# Altium PCB PCB1.PcbDoc
Units mm, origin at the board's own origin, x right, y up, seen from the top; angles counter-clockwise.
Board outline 97.03 x 86.61 mm, 2 copper layers (Top Layer, Bottom Layer); 77 components, 63 nets, 297 pads, 22 vias.
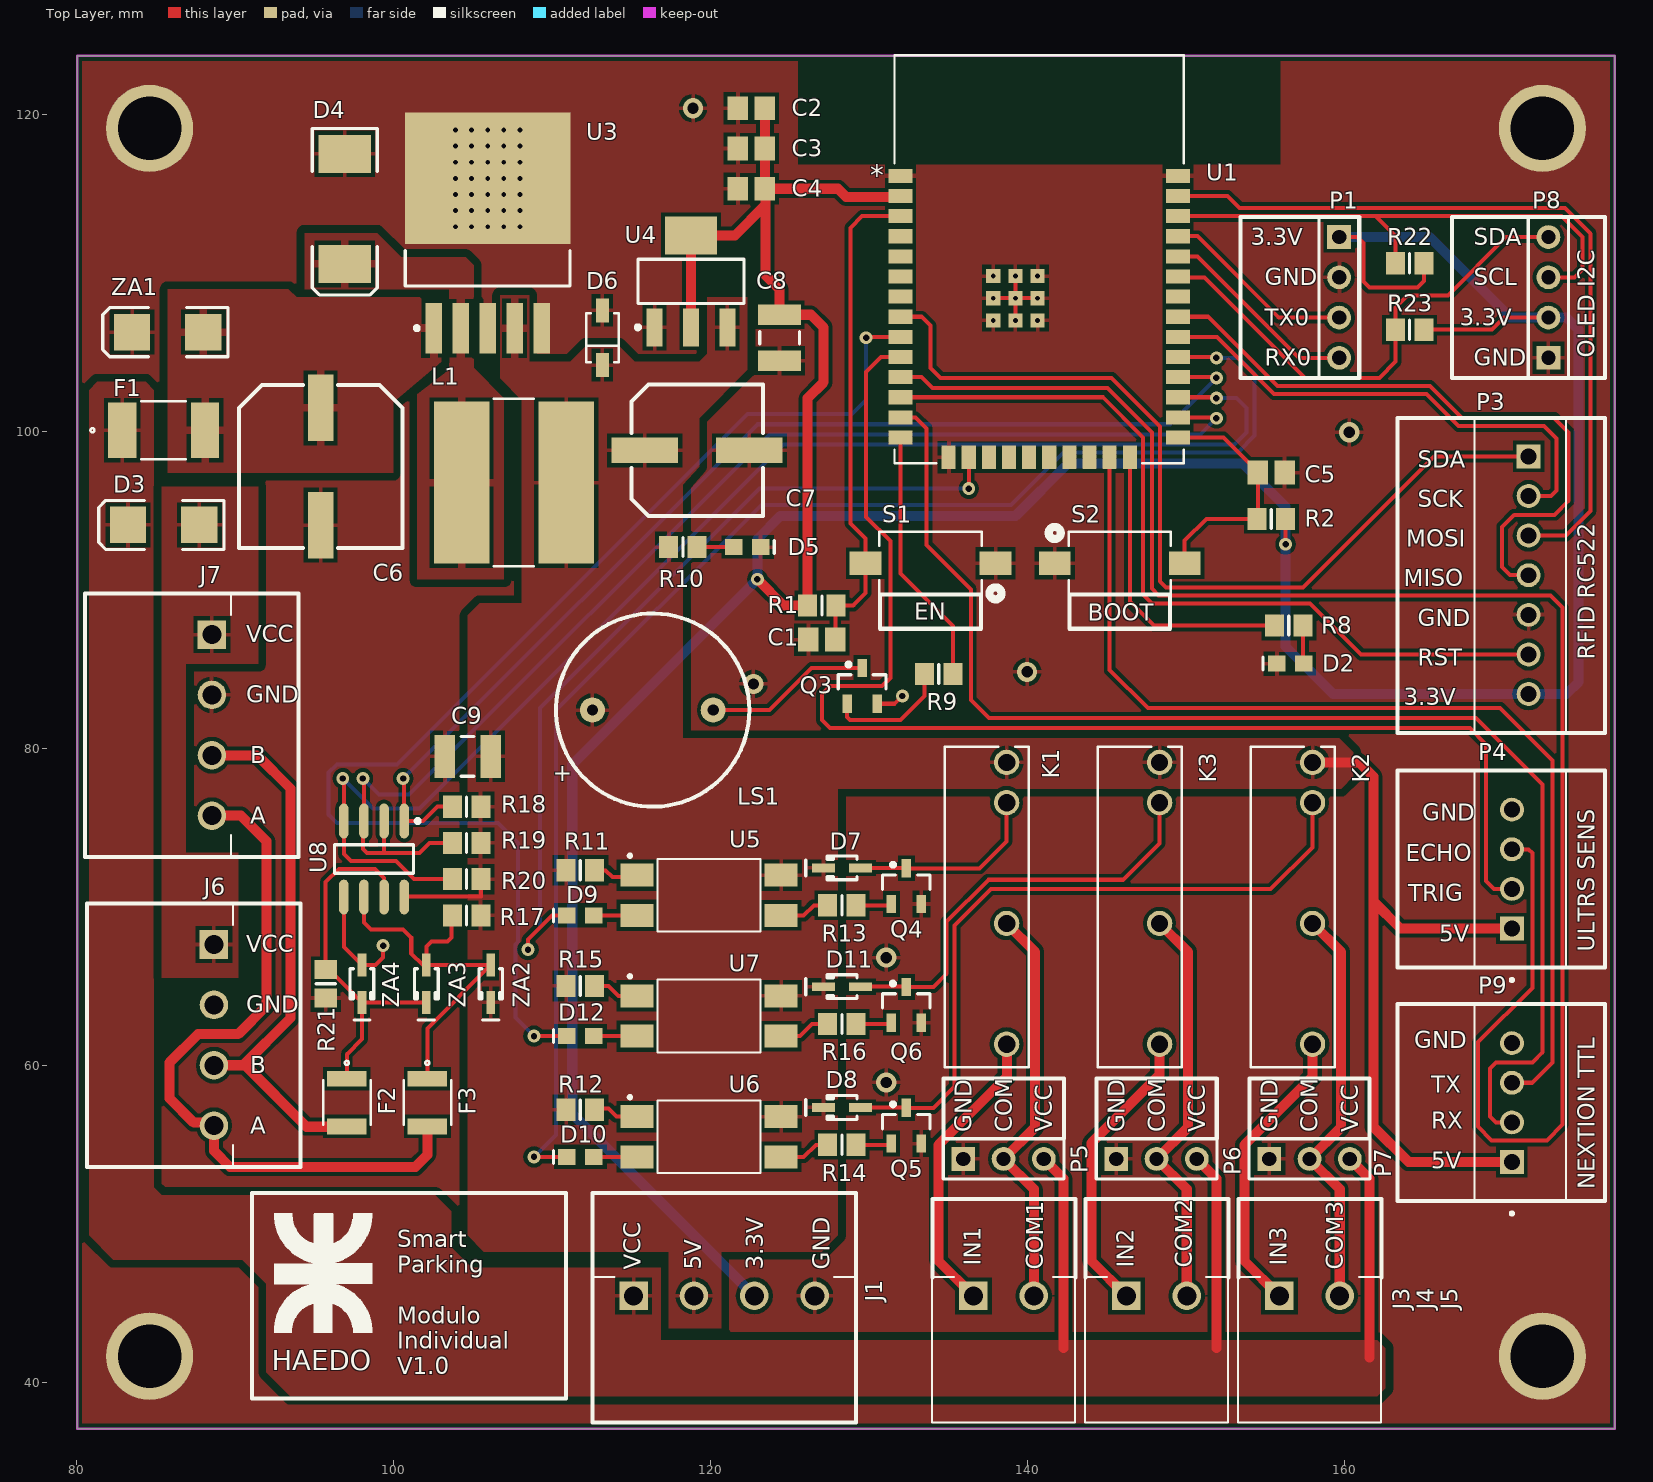
[diagram p0: Top Layer view]
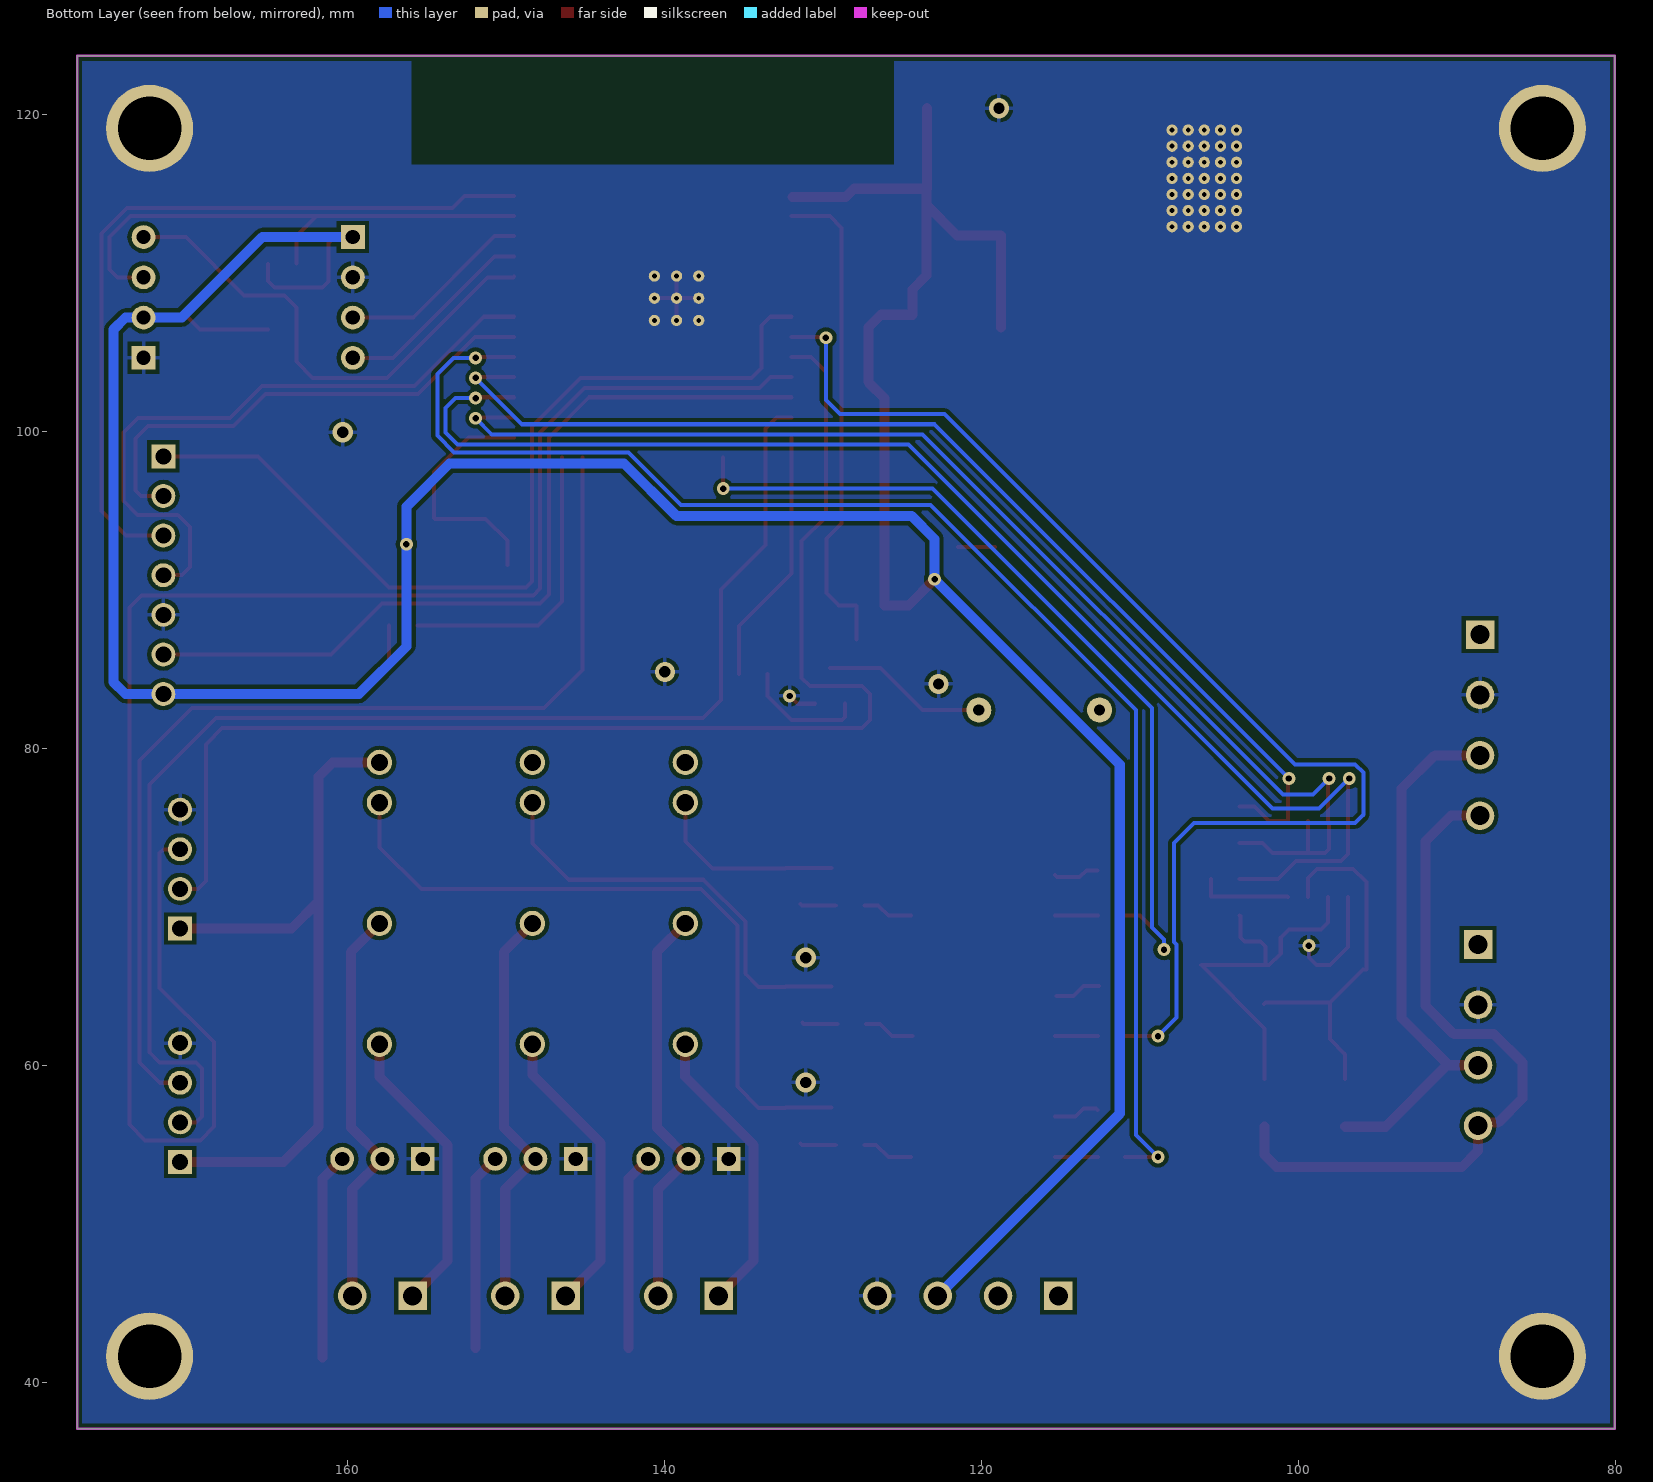
[diagram p1: Bottom Layer view, seen from below]
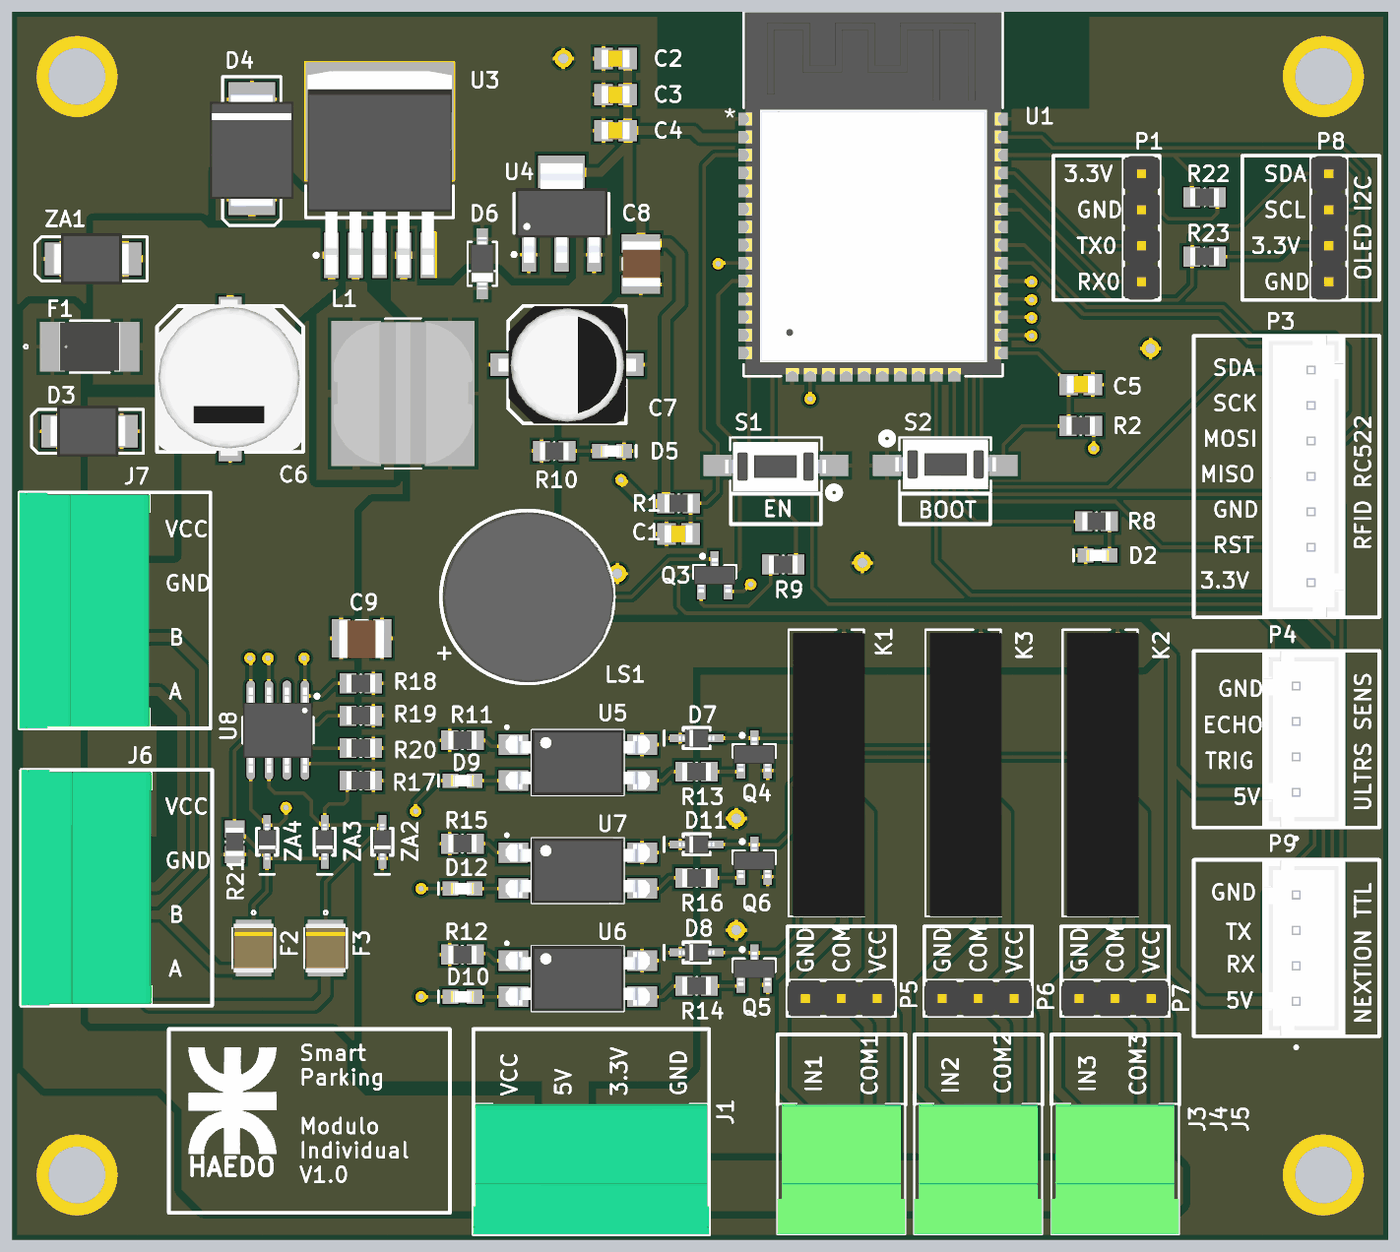
[diagram p2: 3D render of the assembled board from above, using the file's embedded part models]

## Layer stack, top to bottom
Top Solder: solder mask 0.0102, Solder Resist, Dk 3.5
Top Layer: signal copper 0.0356
Dielectric 1: dielectric 0.32, FR-4, Dk 4.8
Bottom Layer: signal copper 0.0356
Bottom Solder: solder mask 0.0102, Solder Resist, Dk 3.5

## Board outline
80.01,37.084 80.01,123.698 177.038,123.698 177.038,37.084

## Design rules (kind name [scope] priority, off if disabled: settings)
Clearance Clearance_6mil [InComponent('U2') OR InComponent('P2')] p1: gap=0.152
Clearance [All] p2: gap=0.254 except(0.508: Poly-Poly)
HoleSize [All] p1: absolutevalues=TRUE maxlimit=5 minlimit=0.025 maxpercent=80.000 minpercent=20.000
MinimumSolderMaskSliver [All] p1: minsoldermaskwidth=0.051
PolygonConnect DirectConnect [(ObjectKind = 'Pad') and (Name Like 'Free-DirectFree') or (Name Like 'U3-6') or (Name Like 'U3-5')] p1: connectstyle=Direct reliefconductorwidth=0.254 reliefentries=4 polygonreliefangle="90 Angle" airgapwidth=0.254
PolygonConnect LM2596 [InNet('NetD4_2') OR InNet('NetC6_1') OR (Name Like 'U3-4') OR (Name Like 'U3-2') or (Name Like 'U3-3')] p2: connectstyle=Relief reliefconductorwidth=0.508 reliefentries=4 polygonreliefangle="90 Angle" airgapwidth=0.254
PolygonConnect [All] p3: connectstyle=Relief reliefconductorwidth=0.254 reliefentries=4 polygonreliefangle="90 Angle" airgapwidth=0.254
RoutingVias [All] p1: holewidth=0.406 width=0.813 viastyle="Through Hole" minholewidth=0.406 minwidth=0.813 maxholewidth=0.406 maxwidth=0.813 viatemplateguid#1={E6CBA73B-ED68-4CBC-8B1B-74DA3DA10CD0} viatemplatename#1=v81h41
SilkToSilkClearance [All] p1: silktosilkclearance=0.051
SilkToSolderMaskClearance [IsPad] p1: minsilkscreentomaskgap=0.025 clearancetoexposedcopper=TRUE
SolderMaskExpansion [All] p1: expansion=0.102
Width [All] p1: maxlimit=0.635 minlimit=0.254 preferedwidth=0.254
26 further rules are at their usual default settings.

## Classes and differential pairs
component class Comunicaciones: C9 F2 F3 J6 J7 P8 P9 R17 R18 R19 R20 R21 R22 R23 U8 ZA2 ZA3 ZA4
component class ESP32-WROOM-32E: C1 C2 C3 C4 C5 P1 R1 R2 S1 S2 U1
component class Fuentes: C6 C7 C8 D3 D4 D5 D6 F1 L1 R10 U3 U4 ZA1
component class MainBoard: D2 J1 LS1 P3 P4 Q3 R8 R9
component class "Salidas con relé": D7 D8 D9 D10 D11 D12 J3 J4 J5 K1 K2 K3 P5 P6 P7 Q4 Q5 Q6 R11 R12 R13 R14 R15 R16 U6 U7

## Components (designator, comment, footprint, x,y, rotation, side; value= is the part's Value field where it differs from the comment)
C1 "100nF" CAPC2012N 127,86.868 r180 top
C2 "0.1uF" CAPC2012N 122.555,120.396 r180 top
C3 "0.1uF" CAPC2012N 122.555,117.856 r180 top
C4 "22uF" CAPC2012N 122.555,115.316 r180 top
C5 "100nF" CAPC2012N 155.36,97.409 r0 top
C6 "470uF" CapElecSMD_10mm 95.376,97.79 r90 top
C7 "330uF" CapElecSMD_8mm 119.126,98.806 r180 top
C8 "10uF" CAPC3225N 124.332,105.918 r270 top
C9 "1uF" CAPC3225N 104.648,79.502 r180 top
D2 "APT1608CGCK" ChipDiode1608 156.545,85.352 r180 top
D3 "RS3JB-13-F" SMB 85.471,94.107 r180 top
D4 "B540C-13-F" SMC 96.9,114.046 r270 top
D5 "APT1608CGCK" ChipDiode1608 122.3,92.71 r0 top
D6 "MMSZ5V6T1G" SOD-123_ONS-M 113.156,105.918 r90 top
D7 "1N4448WS" SOD-323 128.27,72.462 r180 top
D8 "1N4448WS" SOD-323 128.27,57.349 r180 top
D9 "APT1608CGCK" ChipDiode1608 111.76,69.469 r180 top
D10 "APT1608CGCK" ChipDiode1608 111.76,54.229 r180 top
D11 "1N4448WS" SOD-323 128.27,64.969 r180 top
D12 "APT1608CGCK" ChipDiode1608 111.76,61.849 r180 top
F1 "PTS18126V300" FUSE_PTS18126_COB 85.471,100.076 r0 top
F2 "MF-USMF050-2" MF-USMF050-2 97.028,57.658 r270 top
F3 "MF-USMF050-2" MF-USMF050-2 102.108,57.658 r270 top
J1 "TERMBLOCK_3.81MM" TERMBLOCK_3.81MM_90DEG_4POS 120.904,42.545 r0 top
J3 "TERMBLOCK_3.81MM" TERMBLOCK_3.81MM_90DEG_2POS 138.408,41.656 r0 top
J4 "TERMBLOCK_3.81MM" TERMBLOCK_3.81MM_90DEG_2POS 148.06,41.656 r0 top
J5 "TERMBLOCK_3.81MM" TERMBLOCK_3.81MM_90DEG_2POS 157.712,41.656 r0 top
J6 "TERMBLOCK_3.81MM" TERMBLOCK_3.81MM_90DEG_4POS 85.725,61.849 r270 top
J7 "TERMBLOCK_3.81MM" TERMBLOCK_3.81MM_90DEG_4POS 85.598,81.407 r270 top
K1 "G6DN-1A DC5" RELAY_G6DN-1A_OMR 138.658,79.121 r0 top
K2 "G6DN-1A DC5" RELAY_G6DN-1A_OMR 157.962,79.121 r0 top
K3 "G6DN-1A DC5" RELAY_G6DN-1A_OMR 148.31,79.121 r0 top
L1 "47uH" INDUCTOR_47UH_3A 107.568,96.774 r0 top
LS1 "Buzzer" BUZZER 112.522,82.423 r180 top
P1 "USB-TTL" CONNHDR_1X4_2.54MM 159.512,108.458 r270 top
P3 "RFID RC522" MOD_RFID_RC522 171.069,90.932 r0 top
P4 "ULTRS SENS" CONN-B4B-XH-A 171.069,72.39 r270 top
P5 "Header 3" CONNHDR_1X3_2.54MM 138.468,54.102 r0 top
P6 "Header 3" CONNHDR_1X3_2.54MM 148.12,54.102 r0 top
P7 "Header 3" CONNHDR_1X3_2.54MM 157.772,54.102 r0 top
P8 "OLED I2C" CONNHDR_1X4_2.54MM 172.974,108.458 r90 top
P9 "NEXTION TTL" CONN-B4B-XH-A 171.069,57.658 r270 top
Q3 "MMBT3904" MMBT3904 129.54,83.947 r90 top
Q4 "MMBT3904" MMBT3904 132.334,71.312 r90 top
Q5 "MMBT3904" MMBT3904 132.334,56.199 r90 top
Q6 "MMBT3904" MMBT3904 132.334,63.819 r90 top
R1 "10MΩ" RESC2012N 127,89.027 r180 top
R2 "10MΩ" RESC2012N 155.36,94.488 r0 top
R8 "1k" RESC2012N 156.464,87.757 r180 top
R9 "1k" RESC2012N 134.377,84.709 r180 top
R10 "1k" RESC2012N 118.236,92.71 r180 top
R11 "1k" RESC2012N 111.76,72.312 r180 top
R12 "1k" RESC2012N 111.76,57.199 r180 top
R13 "470" RESC2012N 128.27,70.104 r0 top
R14 "470" RESC2012N 128.27,54.991 r0 top
R15 "1k" RESC2012N 111.76,65.017 r180 top
R16 "470" RESC2012N 128.27,62.611 r0 top
R17 "100K" RESC2012N 104.584,69.469 r0 top
R18 "10K" RESC2012N 104.584,76.327 r0 top
R19 "10K" RESC2012N 104.584,74.041 r0 top
R20 "10K" RESC2012N 104.584,71.755 r0 top
R21 "100K" RESC2012N 95.694,65.151 r90 top
R22 "4.7k" RESC2012N 164.084,110.617 r0 top
R23 "4.7k" RESC2012N 164.084,106.426 r0 top
S1 "RESET" "SWITCH TACTILE SPST-NO 0.05A 12V" 133.858,91.694 r180 top
S2 "BOOT" "SWITCH TACTILE SPST-NO 0.05A 12V" 145.796,91.694 r0 top
U1 "ESP32-WROOM-32E" ESP32-WROOM-32E 140.716,110.871 r0 top
U3 "LM2596S-5.0" LM2596S-5.0 106.044,112.522 r90 top
U4 "TLV1117LV33" SOT223 118.744,109.474 r90 top
U5 "FOD817CSD" "OPTOISOLATOR 5KV TRANSISTOR 4SMD" 119.888,70.739 r0 top
U6 "FOD817CSD" "OPTOISOLATOR 5KV TRANSISTOR 4SMD" 119.888,55.499 r0 top
U7 "FOD817CSD" "OPTOISOLATOR 5KV TRANSISTOR 4SMD" 119.888,63.119 r0 top
U8 "MAX485" MAX485 98.742,73.025 r270 top
ZA1 "P6SMB33CA" SMB 85.724,106.268 r180 top
ZA2 "SD12C-7" SOD-323 106.108,65.151 r270 top
ZA3 "SD12C-7" SOD-323 102.044,65.151 r270 top
ZA4 "SD12C-7" SOD-323 97.98,65.151 r270 top

## Footprints (in the part's own frame and the unit in brackets; to place one, negate y for a bottom-side part, rotate by r counter-clockwise, add the part's x,y. Pads: shape width x height; smd on the part's side, far side on the other; paste and mask are expansions set on the pad)
BUZZER [mil]
  round 62 hole 28: 1(0,0) 2(-300,0)
  silkscreen extent -390,-240 90,240, body extent -390,-235 83,237, height 354
CAPC2012N [mm] "Chip Capacitor (Imperial: 0805, Metric: 2012)"
  rect 1.3x1.5 smd: 1(-0.85,0) 2(0.85,0)
  body extent -1,-0.62 1,0.63, height 0.88
CAPC3225N [mm] "Chip Capacitor, Body 3.2x2.5mm, IPC Medium Density"
  rect 1.3x2.7 smd: 1(-1.45,0) 2(1.45,0)
  silkscreen extent -0.4,-1.25 0.4,1.25, body extent -1.6,-1.3 1.6,1.4, height 2.44
CapElecSMD_8mm [mm]
  rect 4.2x1.6 smd: 1(3.3,0) 2(-3.3,0)
  silkscreen extent -4.15,-4.15 4.15,4.15, body extent -4.88,-4.12 4.82,4.17, height 10.2
CapElecSMD_10mm [mm]
  rect 4.2x1.6 smd: 1(3.7,0) 2(-3.7,0)
  silkscreen extent -5.15,-5.15 5.15,5.15, body extent -5.4,-5.07 5.6,5.23, height 12.52
ChipDiode1608 [mm] "Chip Diode; 0603 (1608 Metric)"
  rect 1.1x1 smd: 1(-0.85,0) 2(0.85,0)
  silkscreen extent 1.7,-0.4 1.7,0.4, body extent -0.8,-0.4 0.8,0.4, height 0.75
CONN-B4B-XH-A [mm] "CONN HEADER VERT 4POS 2.5MM"
  rect 1.508x1.508 / inner round 1.508 / far side rect 1.508x1.508 hole 1: 1(3.75,-0.525)
  round 1.508 hole 1: 2(1.25,-0.525) 3(-1.25,-0.525) 4(-3.75,-0.525)
  silkscreen extent -6.2,-2.88 7.1,2.88, body extent -6.2,-2.88 6.2,2.88, height 7
CONNHDR_1X3_2.54MM [mm] "CONN HEADER VERT 3POS 2.54MM"
  rect 1.5x1.5 hole 0.9: 1(-2.54,0)
  round 1.5 hole 0.9: 2(0,0) 3(2.54,0)
  silkscreen extent -3.81,-1.27 3.81,1.27, body extent -3.81,-1.27 3.81,1.27, height 8.54
CONNHDR_1X4_2.54MM [mm] "CONN HEADER VERT 4POS 2.54MM"
  rect 1.5x1.5 hole 0.9: 1(-3.81,0.127)
  round 1.5 hole 0.9: 2(-1.27,0.127) 3(1.27,0.127) 4(3.81,0.127)
  silkscreen extent -5.08,-1.14 5.08,1.4, body extent -5.08,-1.14 5.08,1.4, height 8.54
ESP32-WROOM-32E [mil] "ESP32-WROOM-32E con antena integrada."
  rect 59x35 smd paste+0 mask+0: 1(-344.5,207.1) 2(-344.5,157.1) 3(-344.5,107.1) 4(-344.5,57.1) 5(-344.5,7.1) 6(-344.5,-42.9) 7(-344.5,-92.9) 8(-344.5,-142.9) 9(-344.5,-192.9) 10(-344.5,-242.9) 11(-344.5,-292.9) 12(-344.5,-342.9) 13(-344.5,-392.9) 14(-344.5,-442.9) 25(344.5,-442.9) 26(344.5,-392.9) 27(344.5,-342.9) 28(344.5,-292.9) 29(344.5,-242.9) 30(344.5,-192.9) 31(344.5,-142.9) 32(344.5,-92.9) 33(344.5,-42.9) 34(344.5,7.1) 35(344.5,57.1) 36(344.5,107.1) 37(344.5,157.1) 38(344.5,207.1)
  rect 35x59 smd paste+0 mask+0: 15(-225,-492.15) 16(-175,-492.15) 17(-125,-492.15) 18(-75,-492.15) 19(-25,-492.15) 20(25,-492.15) 21(75,-492.15) 22(125,-492.15) 23(175,-492.15) 24(225,-492.15)
  rect 35x35 smd paste+0 mask+0: 39(-59.1,-96.9) 40(-114.2,-41.8) 41(-114.2,-96.9) 42(-114.2,-152) 43(-59.1,-152) 44(-4,-152) 45(-4,-96.9) 46(-4,-41.8) 47(-59.1,-41.8)
  silkscreen extent -360,-507 360,507, body extent -354,-502 355,502, height 128
FUSE_PTS18126_COB [mil]
  rect 70x138 smd paste+0 mask+0: 1(-102.95,0) 2(102.95,0)
  silkscreen extent -182,-72 55,72, body extent -84,-69 84,69, height 47
INDUCTOR_47UH_3A [mil] "CIAA_NXP"
  rect 138x402 smd paste+0 mask+0: 1(-130,0) 2(130,0)
  silkscreen extent -50,-208 50,208, body extent -193,-196 193,198, height 236
LM2596S-5.0 [mm] "IC REG BUCK 5V 3A TO263-5L"
  rect 3.2x1.05 smd: 1(-6,3.527) 2(-6,1.827) 3(-6,0.127) 4(-6,-1.573) 5(-6,-3.273)
  rect 8.3x10.45 smd: 6(3.45,0.127)
  silkscreen extent -6.12,-5.07 -1.1,5.33, body extent -7.37,-4.95 6.98,5.21, height 4.65
MAX485 [mm] "IC TRANSCEIVER HALF 1/1 8SOIC"
  oval 2.2x0.6 smd: 1(-2.4,1.905) 2(-2.4,0.635) 3(-2.4,-0.635) 4(-2.4,-1.905) 5(2.4,-1.905) 6(2.4,-0.635) 7(2.4,0.635) 8(2.4,1.905)
  silkscreen extent -2.52,-2.5 0.9,2.88, body extent -3,-2.45 3,2.45, height 1.75
MF-USMF050-2 [mm]
  rect 1x2.5 smd paste+0 mask+0: 1(-1.5,0) 2(1.5,0)
  silkscreen extent -2.63,-1.5 1.4,1.5, body extent -1.71,-1.4 1.71,1.4, height 1.09
MMBT3904 [mm] "SOT23_N"
  rect 1.15x0.6 smd: 1(-1.125,-0.95) 2(-1.125,0.95) 3(1.125,0)
  silkscreen extent -0.2,-1.5 1.47,1.5, body extent -1.2,-1.45 1.2,1.45, height 1.14
MOD_RFID_RC522 [mm] "Módulo comercial RFID RC522"
  rect 1.508x1.508 / inner round 1.508 / far side rect 1.508x1.508 hole 1: 1(0.525,7.5)
  round 1.508 hole 1: 2(0.525,5) 3(0.525,2.5) 4(0.525,0) 5(0.525,-2.5) 6(0.525,-5) 7(0.525,-7.5)
  silkscreen extent -2.88,-9.95 2.88,9.95, body extent -2.88,-9.95 2.88,9.95, height 7
"OPTOISOLATOR 5KV TRANSISTOR 4SMD" [mm] "FOD817CSD"
  rect 2.09x1.44 smd: 1(-4.54,1.27) 2(-4.54,-1.27) 3(4.54,-1.27) 4(4.54,1.27)
  silkscreen extent -5.1,-2.3 3.25,2.6, body extent -5.08,-2.3 5.08,2.3, height 3.85
RELAY_G6DN-1A_OMR [mil]
  round 63 / inner round 60 / far side round 63 hole 43 paste-31.5 mask+0: 1(0,0) 2(0,-100) 5(0,-400) 8(0,-700)
  silkscreen extent -153,-757 55,39, body extent -142,-758 58,30, height 492
RESC2012N [mm] "Chip Resistor (Imperial: 0805, Metric: 2012)"
  rect 1.2x1.4 smd: 1(-0.9,0) 2(0.9,0)
  silkscreen extent 0,-0.6 0,0.6, body extent -1,-0.62 1,0.63, height 0.65
SMB [mm] "DO-214-AA/SMB; 2 C-Bend Leads; Body 5.3 x 3.6 mm, inc. leads (LxW)"
  rect 2.3x2.3 smd: 1(-2.25,0) 2(2.25,0)
  silkscreen extent -3.8,-1.55 4.1,1.55, body extent -2.52,-1.81 2.77,1.81, height 2.5
SMC [mm] "DO-214-AB/SMC; 2 C-Bend Leads; Body 7.9 x 5.9 mm, inc. leads (LxW)"
  rect 2.4x3.3 smd: 1(-3.475,0) 2(3.475,0)
  silkscreen extent -5.07,-2.05 5.43,2.05, body extent -3.84,-2.95 4.1,2.95, height 2.5
SOD-123_ONS-M [mil] "MMSZ5V6T1G"
  rect 60x32 smd paste+0 mask+0: 1(-68,0) 2(68,0)
  silkscreen extent -61,-41 61,41, body extent -71,-31 73,31, height 53
SOD-323 [mm] "SOD-323/SC-76; 2 Leads; Body 1.7 x 1.3 mm, (LxW)"
  rect 1.45x0.55 smd: 1(1.175,0) 2(-1.175,0)
  silkscreen extent -0.95,-0.75 2.29,0.75, body extent -1.25,-0.62 1.25,0.62, height 1
SOT223 [mm] "SOT223, 4-Leads, Body 6.5x3.5mm, Pitch 2.3mm, Lead Span 7mm, IPC Medium Density"
  rect 2.4x1 smd: 1(-2.9,2.3) 2(-2.9,0) 3(-2.9,-2.3)
  rect 2.4x3.3 smd: 4(2.9,0)
  silkscreen extent -3.02,-3.35 1.4,3.47, body extent -3.47,-3.25 3.52,3.25, height 1.8
"SWITCH TACTILE SPST-NO 0.05A 12V" [mil] "PTS636 SM50 SMTR LFS"
  rect 79x59 smd paste+0 mask+0: 1(-161.42,0) 2(161.42,0)
  silkscreen extent -176,-78 127,90, body extent -139,-66 141,72, height 169
TERMBLOCK_3.81MM_90DEG_2POS [mm] "TERM BLOCK HDR 2POS 3.81MM 90 DEGREES"
  rect 1.8x1.8 / inner round 1.8 / far side rect 1.8x1.8 hole 1.2: 01(-1.845,3.809)
  round 1.8 hole 1.2: 02(1.965,3.809)
  silkscreen extent -4.44,-4.19 4.56,5.01, body extent -4.44,-4.19 4.56,5.01, height 7.4
TERMBLOCK_3.81MM_90DEG_4POS [mm]
  rect 1.8x1.8 / inner round 1.8 / far side rect 1.8x1.8 hole 1.2: 01(-5.782,2.92)
  round 1.8 hole 1.2: 02(-1.972,2.92) 03(1.838,2.92) 04(5.648,2.92)
  silkscreen extent -8.38,-5.08 8.25,4.12, body extent -8.38,-5.08 8.25,4.12, height 7.31

## Part data
C1 C2 C3 C4 C5: library part Cap, "Capacitor"
C6 C7 C8 C9: library part "Cap Pol3", "Polarized Capacitor (Surface Mount)"
D2 D5 D9 D10 D12: library part LED2, "LED 1.6x0.8 mm 570 nm GRN CLR SMD"
D3 D4 D7 D8 D11: library part Diode, "Default Diode"
D6: library part "D Zener", "Zener Diode"
F1: "PTC RESET FUSE 6V 3A 1812"
F2 F3: library part PTS18126V300, "PTC RESET FUSE 6V 3A 1812"
J1 J6 J7: library part TERMBLOCK_3.81MM_90DEG_4POS, "TERMBLOCK_3.81MM_90DEG_4POS (DigiKey: 1803293)"
J3 J4 J5: library part TERMBLOCK_3.81MM_90DEG_2POS, "TERMBLOCK_3.81MM_90DEG_2POS (DigiKey: 1803277)"
K1 K2 K3: "Rele_Omron_5V_5A"
L1: library part Inductor, "Inductor"
LS1: library part Bell, "Electrical Bell"
P1 P8: library part MHDR1X4, "Header, 4-Pin"
P3: library part MOD_RFID_RC522, "Módulo RFID RC522 con conector B7B-XH-A"
P4: library part CONN-B4B-XH-A, "B4B-XH-A - CONN HEADER VERT 4POS 2.5MM"
P5 P6 P7: "Header, 3-Pin"
P9: library part CONN-B4B-XH-A, "CONN HEADER VERT 4POS 2.5MM"
Q3 Q4 Q5 Q6: "TRANS NPN 40V 0.2A SOT-23-3"
R1 R2: library part Res1, "Resistor"
R8 R9 R10 R11 R12 R13 R14 R15 R16 R17 R18 R19 R20 R21: library part Res3, "Resistor"
R22 R23: library part Res2, "Resistor"
S1 S2: library part SW-PB, "Switch"
U3: "IC REG BUCK 5V 3A TO263-5L"
U4: "1-A, Positive Fixed Voltage, Low-Dropout Regulator"
U5 U6 U7: library part Optoisolator1, "4-Pin Phototransistor Optocoupler"
U8: "Low-Power RS-485/RS-422 Multipoint Transceiver, 8-pin Narrow SOIC"
ZA1 ZA2 ZA3 ZA4: library part "TVS Diode", "Transient voltage suppressor diode"

## Free pads (board coordinates)
  round 5.5 hole 4: DirectFree(84.582,41.656) DirectFree(84.582,119.126) DirectFree(172.466,41.656) DirectFree(172.466,119.126)
  round 0.711 hole 0.305: DirectFree(103.885,112.924) DirectFree(103.885,113.94) DirectFree(103.885,114.956) DirectFree(103.885,115.972) DirectFree(103.885,116.988) DirectFree(103.885,118.004) DirectFree(103.885,119.02) DirectFree(104.901,112.924) DirectFree(104.901,113.94) DirectFree(104.901,114.956) DirectFree(104.901,115.972) DirectFree(104.901,116.988) DirectFree(104.901,118.004) DirectFree(104.901,119.02) DirectFree(105.917,112.924) DirectFree(105.917,113.94) DirectFree(105.917,114.956) DirectFree(105.917,115.972) DirectFree(105.917,116.988) DirectFree(105.917,118.004) DirectFree(105.917,119.02) DirectFree(106.933,112.924) DirectFree(106.933,113.94) DirectFree(106.933,114.956) DirectFree(106.933,115.972) DirectFree(106.933,116.988) DirectFree(106.933,118.004) DirectFree(106.933,119.02) DirectFree(107.949,112.924) DirectFree(107.949,113.94) DirectFree(107.949,114.956) DirectFree(107.949,115.972) DirectFree(107.949,116.988) DirectFree(107.949,118.004) DirectFree(107.949,119.02) DirectFree(137.815,107.01) DirectFree(137.815,108.41) DirectFree(137.815,109.809) DirectFree(139.215,107.01) DirectFree(139.215,108.41) DirectFree(139.215,109.809) DirectFree(140.614,107.01) DirectFree(140.614,108.41) DirectFree(140.614,109.809)

## Via types
v1: diameter 0.813, hole 0.406, Top Layer to Bottom Layer, 16 vias
v2: diameter 1.27, hole 0.711, Top Layer to Bottom Layer, 6 vias

## Nets (pads, with @x,y where several pads share a name; then routed paths per layer and width w, separated by ;. In a path a pad name is that pad's centre, name@x,y a point inside that pad or via, vN(x,y) a via of type N, cw(c..) or ccw(c..) an arc to the next point about the centre after c; other vN are vias at no path point)
+3.3V: C2.1 C3.1 C4.1 C8.1 J1.03 P1.1 P3.7 P8.2 R1.2 R2.2 R22.2 R23.2 U1.2 U4.2 U4.4 | length 241.4
  Top Layer w0.254: v1(156.26,92.887) R2.2 ; P1.1 160.782,112.268 161.163,111.887 161.163,109.474 161.544,109.093 164.592,109.093 164.984,109.485 R22.2@164.984,110.578 ; R23.2 169.291,106.426 170.053,107.188 P8.2
  Top Layer w0.635: U4.2 U4.4 121.518,112.374 123.405,114.261 ; v1(122.936,90.678) 124.587,89.027 R1.2 126.1,102.097 127.114,103.111 127.114,106.566 126.312,107.368 C8.1 ; C2.1 C3.1 C4.1 128.016,115.316 128.524,114.808 U1.2@131.912,114.808 ; C4.1@123.444,115.316 123.444,109.853 124.332,108.965 C8.1 ; 124.332,108.967 C8.1
  Bottom Layer w0.635: J1.03 111.252,56.955 111.252,78.994 v1(122.936,90.678) 122.936,93.218 124.396,94.678 139.227,94.678 142.529,97.98 153.535,97.98 156.26,95.255 v1(156.26,92.887) 156.26,86.437 159.265,83.432 P3.7 173.983,83.432 174.752,84.201 174.752,106.426 173.99,107.188 P8.2 170.434,107.188 165.354,112.268 P1.1
"+5 V": C7.1 C9.1 D6.1 D7.1 D8.1 D11.1 J1.02 K1.1 K2.1 K3.1 L1.2 LS1.1 P4.1 P9.1 R10.2 R11.2 R12.2 R15.2 R17.2 R18.2 R19.2 R20.2 U3.4 U4.3 U5.4 U6.4 U7.4 U8.8 ZA2.1 | length 51.4
  Top Layer w0.254: U8.8 100.697,70.674 105.485,70.674 R20.2
  Top Layer w0.635: K2.1 160.909,79.121 161.798,78.232 161.798,70.358 ; P9.1 164.024,53.908 161.798,56.134 161.798,70.358 ; P4.1 163.516,68.64 161.798,70.358
BUZZER: R9.1 U1.14 | length 16.3
  Top Layer w0.254: U1.14 131.966,91.046 135.277,87.735 R9.1
COM1: J3.02 K1.5 P5.2 | length 25.9
  Top Layer w0.635: K1.5 140.462,67.157 140.462,56.096 P5.2 140.373,52.197 J3.02
COM2: J4.02 K3.5 P6.2 | length 25.9
  Top Layer w0.635: K3.5 150.114,67.157 150.114,56.096 P6.2 150.025,52.197 J4.02
COM3: J5.02 K2.5 P7.2 | length 25.9
  Top Layer w0.635: K2.5 159.766,67.157 159.766,56.096 P7.2 159.677,52.197 J5.02
EN: C1.1 R1.1 S1.2 U1.3 | length 31.3
  Top Layer w0.254: C1.1 127.85,88.977 R1.1 128.981,89.027 129.758,89.804 S1.2 129.758,93.254 128.803,94.209 128.803,112.852 129.543,113.591 U1.3
GND: C1.2 C2.2 C3.2 C4.2 C5.2 C6.2 C7.2 C8.2 C9.2 D2.2 D4.1 D5.2 D6.2 J1.04 J6.02 J7.02 P1.2 P3.5 P4.4 P5.1 P6.1 P7.1 P8.1 P9.4 pad.DirectFree Q3.1 Q4.1 Q5.1 Q6.1 R21.1 S1.1 S2.1 U1.1 U1.15 U1.38 U1.39 U1.40 U1.41 U1.42 U1.43 U1.44 U1.45 U1.46 U1.47 U3.3 U3.5 U3.6 U4.1 U8.5 ZA1.2 ZA4.2 | length 14.5
  Top Layer w0.254: U8.5 96.837,67.469 ZA4.2 98.838,66.326 99.314,66.802 v1(99.314,67.564) ; Q3.1 131.59,82.822 v1(132.08,83.312) ; U1.41 U1.39 ; U1.43 U1.39 ; U1.47 U1.39 ; U1.45 U1.39
  other v2: 131.064,58.928 131.064,66.802 122.682,84.074 139.954,84.836 160.274,99.949 118.872,120.396
IN1: J3.01 K1.8 | length 18.2
  Top Layer w0.635: J3.01 134.366,47.662 134.366,54.991 138.684,59.309 K1.8@138.684,60.96
IN2: J4.01 K3.8 | length 18.6
  Top Layer w0.635: J4.01 144.018,47.662 144.018,55.118 148.31,59.41 K3.8
IN3: J5.01 K2.8 | length 18.6
  Top Layer w0.635: J5.01 153.67,47.662 153.67,54.991 156.591,57.912 157.962,59.283 K2.8
IO0: C5.1 R2.1 S2.2 U1.25 | length 15.6
  Top Layer w0.254: U1.25 152.347,99.621 154.51,97.458 C5.1 154.51,94.538 R2.1 151.257,94.488 149.896,93.127 S2.2@149.896,91.567
LED: R8.2 U1.24 | length 18.9
  Top Layer w0.254: U1.24 146.431,89.281 147.955,87.757 R8.2
NetC6_1: C6.1 F1.2 U3.1 ZA1.1
NetD2_1: D2.1 R8.1 | length 2.4
  Top Layer w0.254: D2.1@157.364,85.383 R8.1
NetD4_2: D4.2 L1.1 U3.2
NetD5_1: D5.1 R10.1 | length 2.3
  Top Layer w0.254: R10.1 D5.1
NetD7_2: D7.2 K1.2 Q4.3 | length 12.4
  Top Layer w0.254: D7.2 Q4.3@132.334,72.462 ; Q4.3 136.953,72.437 138.658,74.142 K1.2
NetD8_2: D8.2 K2.2 Q5.3 | length 44.1
  Top Layer w0.254: D8.2 132.309,57.349 Q5.3 134.032,57.324 135.382,58.674 135.382,68.834 137.668,71.12 155.321,71.12 157.962,73.761 K2.2
NetD9_1: D9.1 U5.2 | length 2.7
  Top Layer w0.254: D9.1 U5.2
NetD10_1: D10.1 U6.2 | length 2.7
  Top Layer w0.254: D10.1 U6.2
NetD11_2: D11.2 K3.2 Q6.3 | length 27.1
  Top Layer w0.254: D11.2 132.309,64.969 Q6.3 134.032,64.944 134.874,65.786 134.874,69.088 137.503,71.717 146.012,71.717 148.31,74.015 K3.2
NetD12_1: D12.1 U7.2 | length 2.7
  Top Layer w0.254: D12.1 U7.2
NetF2_1: F2.1 R21.2 U8.7 ZA3.1 ZA4.1 | length 23.5
  Top Layer w0.254: F2.1 97.028,60.706 97.98,61.658 ZA4.1 ; U8.7 99.377,71.819 98.806,72.39 96.52,72.39 95.694,71.564 R21.2 95.906,66.051 ZA4.1 ; ZA3.1@102.14,63.881 ZA3.1 ZA4.1
NetF2_2: F2.2 J6.03 J7.03 | length 34.5
  Top Layer w0.635: J7.03 91.373,79.569 93.472,77.47 93.472,62.992 90.491,60.011 ; J6.03 90.491,60.011 ; F2.2 97.004,56.134 94.488,56.134 90.611,60.011 90.491,60.011
NetF3_1: F3.1 R17.1 U8.6 ZA2.2 ZA3.2 | length 24.6
  Top Layer w0.254: U8.6 98.108,69.025 98.552,68.58 100.584,68.58 101.092,68.072 101.092,67.056 101.822,66.326 ZA3.2 ; F3.1 102.108,62.325 ZA2.2 ZA3.2 ; R17.1 103.632,69.417 103.632,68.072 103.378,67.818 102.362,67.818 102.044,67.501 ZA3.2
NetF3_2: F3.2 J6.04 J7.04 | length 45.5
  Top Layer w0.635: J7.04 90.357,75.759 91.948,74.168 91.948,63.754 90.17,61.976 87.63,61.976 85.852,60.198 85.852,57.912 87.376,56.388 88.458,56.388 J6.04 88.645,54.611 89.662,53.594 101.346,53.594 102.108,54.356 F3.2
NetLS1_2: LS1.2 Q3.3 | length 10.5
  Top Layer w0.254: LS1.2 123.698,82.423 126.347,85.072 Q3.3
NetQ3_2: Q3.2 R9.2 | length 7.8
  Top Layer w0.254: Q3.2 128.59,81.976 128.778,81.788 131.953,81.788 133.477,83.312 R9.2
NetQ4_2: Q4.2 R13.2 | length 2.2
  Top Layer w0.254: R13.2 131.301,70.104 Q4.2
NetQ5_2: Q5.2 R14.2 | length 2.2
  Top Layer w0.254: R14.2 131.301,54.991 Q5.2
NetQ6_2: Q6.2 R16.2 | length 2.2
  Top Layer w0.254: R16.2@129.065,62.611 131.196,62.611 Q6.2@131.279,62.694
NetR11_1: R11.1 U5.1 | length 2.9
  Top Layer w0.254: R11.1 113.362,72.312 113.792,71.882 115.221,71.882 U5.1
NetR12_1: R12.1 U6.1 | length 2.9
  Top Layer w0.254: R12.1 112.738,57.277 113.538,57.277 114.046,56.769 U6.1
NetR13_1: R13.1 U5.3 | length 3.2
  Top Layer w0.254: U5.3 125.857,69.469 126.492,70.104 R13.1
NetR14_1: R14.1 U6.3 | length 3.3
  Top Layer w0.254: U6.3 125.857,54.229 126.619,54.991 R14.1
NetR15_1: R15.1 U7.1 | length 2.9
  Top Layer w0.254: R15.1@112.555,65.017 113.538,65.017 114.166,64.389 U7.1@115.243,64.389
NetR16_1: R16.1 U7.3 | length 3.3
  Top Layer w0.254: U7.3@124.323,61.849 125.625,61.849 126.387,62.611 R16.1@127.265,62.611
NetU1_4: U1.4
NetU1_5: U1.5
NetU1_6: U1.6
NetU1_7: U1.7
NEXTION_RXD: P9.2 U1.13 | length 83.7
  Top Layer w0.254: U1.13 132.916,100.891 133.604,100.203 133.604,92.837 136.398,90.043 136.398,83.058 137.541,81.915 168.275,81.915 172.466,77.724 172.466,60.833 171.831,60.198 169.545,60.198 169.164,59.817 169.164,56.769 169.525,56.408 P9.2
NEXTION_TXD: P9.3 U1.23 | length 65.9
  Top Layer w0.254: U1.23 145.161,84.963 147.574,82.55 169.799,82.55 173.101,79.248 173.101,60.198 171.811,58.908 P9.3
OLED_SCL: P8.3 R22.1 U1.36 | length 34
  Top Layer w0.254: U1.36 161.925,113.591 ; R22.1 163.184,112.332 161.925,113.591 ; P8.3 174.498,109.728 175.006,110.236 175.006,112.268 173.683,113.591 161.925,113.591
OLED_SDA: P8.4 R23.1 U1.33 | length 31.7
  Top Layer w0.254: U1.33 149.52,109.728 151.13,109.728 157.48,103.378 162.179,103.378 163.204,104.403 R23.1@163.204,106.426 ; R23.1@163.195,106.426 163.195,107.823 163.957,108.585 166.497,108.585 170.18,112.268 P8.4
RELAY_1: D9.2 U1.16 | length 54
  Top Layer w0.254: v1(108.458,67.31) 108.458,67.945 109.982,69.469 D9.2 ; v1(136.271,96.393) U1.16
  Bottom Layer w0.254: v1(108.458,67.31) 108.458,67.945 109.22,68.707 109.22,82.55 123.063,96.393 v1(136.271,96.393)
RELAY_2: D12.2 U1.9 | length 79.9
  Top Layer w0.254: v1(108.839,61.849) D12.2 ; v1(129.794,105.918) 129.847,105.971 U1.9
  Bottom Layer w0.254: v1(108.839,61.849) 107.671,63.017 107.671,67.636 107.823,67.789 107.823,74.041 106.553,75.311 96.393,75.311 95.885,75.819 95.885,78.486 96.393,78.994 100.203,78.994 122.301,101.092 128.905,101.092 129.794,101.981 v1(129.794,105.918)
RELAY_3: D10.2 U1.29 | length 91.3
  Top Layer w0.254: v1(108.839,54.229) D10.2 ; U1.29 151.839,104.701 v1(151.892,104.648)
  Bottom Layer w0.254: v1(108.839,54.229) 110.236,55.626 110.236,82.423 123.19,95.377 138.938,95.377 142.24,98.679 153.245,98.679 154.305,99.739 154.305,103.632 153.289,104.648 v1(151.892,104.648)
RFID_MISO: P3.4 U1.31 | length 41.3
  Top Layer w0.254: U1.31 151.374,107.241 155.746,102.87 165.374,102.87 167.386,100.858 173.208,100.858 174.117,99.949 174.117,95.631 173.228,94.742 170.688,94.742 169.926,93.98 169.926,91.44 170.434,90.932 P3.4
RFID_MOSI: P3.3 U1.37 | length 49.1
  Top Layer w0.254: U1.37 152.601,114.861 153.363,114.099 173.893,114.099 175.514,112.478 175.514,94.996 173.95,93.432 P3.3
RFID_RST: P3.6 U1.12 | length 52.2
  Top Layer w0.254: U1.12 144.727,102.161 147.256,99.632 147.256,89.725 147.828,89.154 157.806,89.154 161.028,85.932 P3.6
RFID_SCK: P3.2 U1.30 | length 31.7
  Top Layer w0.254: U1.30 151.926,105.971 155.535,102.362 165.164,102.362 167.176,100.35 172.573,100.35 173.355,99.568 173.355,96.266 173.021,95.932 P3.2
RFID_SDA: P3.1 U1.8 | length 57.4
  Top Layer w0.254: U1.8 133.297,107.241 133.858,106.68 133.858,104.013 134.493,103.378 145.288,103.378 148.336,100.33 148.336,90.551 148.717,90.17 157.353,90.17 165.615,98.432 P3.1
RS485_DIR: R19.1 U1.26 U8.2 U8.3 | length 79.5
  Top Layer w0.254: v1(98.044,78.105) 98.108,78.041 U8.3 98.044,75.362 98.044,73.66 98.298,73.406 99.314,73.406 ; U8.2 99.377,73.469 99.314,73.406 ; R19.1 102.235,74.041 101.6,73.406 99.314,73.406 ; U1.26 152.072,100.891 152.019,100.838 v1(151.892,100.838)
  Bottom Layer w0.254: v1(98.044,78.105) 99.06,77.089 100.965,77.089 123.698,99.822 150.876,99.822 v1(151.892,100.838)
RS485_RXD: R18.1 U1.28 U8.1 | length 70.3
  Top Layer w0.254: v1(100.584,78.105) 100.647,78.041 U8.1 101.841,75.425 102.743,76.327 R18.1 ; U1.28 151.839,103.431 v1(151.892,103.378)
  Bottom Layer w0.254: v1(100.584,78.105) 122.936,100.457 148.971,100.457 v1(151.892,103.378)
RS485_TXD: R20.1 U1.27 U8.4 | length 86.1
  Top Layer w0.254: v1(96.774,78.105) 96.837,78.041 U8.4 96.837,73.343 97.282,72.898 100.138,72.898 101.281,71.755 R20.1 ; U1.27 151.839,102.161 v1(151.892,102.108)
  Bottom Layer w0.254: v1(96.774,78.105) 98.679,76.2 101.6,76.2 124.587,99.187 153.035,99.187 153.797,99.949 153.797,101.473 153.162,102.108 v1(151.892,102.108)
RXD0: P1.4 U1.34 | length 12.8
  Top Layer w0.254: U1.34 150.696,111.051 157.099,104.648 P1.4
TXD0: P1.3 U1.35 | length 12.3
  Top Layer w0.254: U1.35 150.696,112.321 155.829,107.188 P1.3
ULTSON_ECHO: P4.3 U1.11 | length 112.4
  Top Layer w0.254: U1.11 133.297,103.431 133.985,102.743 145.034,102.743 147.828,99.949 147.828,90.087 148.253,89.662 172.974,89.662 173.736,88.9 173.736,56.261 172.748,55.273 169.263,55.273 168.402,56.134 168.402,61.468 171.831,64.897 171.831,73.406 171.597,73.64 P4.3
ULTSON_TRIG: P4.2 U1.10 | length 81.9
  Top Layer w0.254: U1.10 130.736,104.701 129.794,103.759 129.794,94.615 131.318,93.091 131.318,84.455 130.81,83.947 127.508,83.947 127,83.439 127,81.788 127.508,81.28 167.894,81.28 168.91,80.264 168.91,71.628 169.398,71.14 P4.2
VCC: D3.2 F1.1 J1.01 P5.3 P6.3 P7.3 | length 37.9
  Top Layer w0.635: P5.3 142.24,52.87 142.24,42.164 ; P6.3 151.892,52.87 151.892,42.164 ; P7.3 161.544,52.87 161.544,41.581
VIN: D3.1 J6.01 J7.01
pads on no net: U1.17 U1.18 U1.19 U1.20 U1.21 U1.22 U1.32

## Polygon pours and split planes (outlines as drawn)
GND on Top Layer "GND_TOP" (solid, pour order 12): 80.01,123.698 125.476,123.698 125.476,116.84 155.956,116.84 155.956,123.69 177.038,123.698 177.038,37.084 80.01,37.084
VCC on Top Layer "VCC" (solid, pour order 10): 81.28,103.124 84.328,103.124 84.836,102.616 84.836,52.324 85.344,51.816 102.616,51.816 103.632,50.8 103.632,48.514 104.902,47.244 116.84,47.244 116.84,42.672 162.052,42.672 162.56,42.164 162.56,39.624 162.052,39.116 93.472,39.116 91.948,40.64 91.948,46.228 90.424,47.752 82.296,47.752 80.772,49.276 80.772,102.616
NetC6_1 on Top Layer "Cin" (solid, pour order 0): 86.233,97.409 99.949,97.409 99.949,101.854 102.997,104.394 102.997,108.458 93.853,108.458 93.345,108.966 86.36,108.966 85.725,108.966 85.725,97.409
"+5 V" on Top Layer "5V" (solid, pour order 6): 118.237,80.645 118.237,96.647 119.252,97.79 119.252,100.837 122.301,103.886 122.301,108.458 119.761,108.458 119.761,104.902 119.253,104.394 115.188,104.394 114.172,105.41 112.14,105.41 111.124,104.394 108.534,104.394 108.534,108.585 106.705,108.585 106.705,103.353 108.077,101.981 108.077,89.154 105.41,89.154 104.648,88.392 104.648,49.276 105.664,48.26 117.348,48.26 117.348,43.434 120.65,43.434 120.65,48.26 127,48.26 128.016,49.276 128.016,77.47 159.766,77.47 160.528,78.232 160.528,79.756 159.639,80.645
NetD4_2 on Top Layer "POLY-LM2596-D4" (solid, pour order 2): 94.36,112.522 94.36,109.474 94.36,108.966 94.868,108.966 103.504,108.966 103.504,103.886 101.472,102.362 101.472,101.346 101.472,90.678 106.934,90.678 106.934,102.108 105.028,104.014 105.028,110.49 104.52,110.998 100.456,110.998 98.932,112.522 96.9,112.522
VIN on Top Layer "VIN" (solid, pour order 8): 85.344,96.52 91.44,96.52 91.44,85.344 86.868,85.344 86.868,73.406 90.17,73.406 90.17,65.532 85.344,65.532 85.344,85.344
GND on Bottom Layer "GND_BOTTOM" (solid, pour order 14): 80.01,123.698 125.476,123.698 125.476,116.84 155.956,116.84 155.956,123.698 177.038,123.698 177.038,37.084 80.01,37.084

## Keep-outs
Keep-Out Layer:
  the board outline again, w0.152

## Silkscreen, mask and mechanical layers (free items; w line width, h text height)
Top Overlay:
  drawing of 67 lines, arcs and shapes, not listed
  text "3.3V" at 154.051,111.76 h1.07
  text "SDA" at 168.148,111.76 h1.07
  text "GND" at 154.94,109.22 h1.07
  text "SCL" at 168.148,109.22 h1.07
  text "TX0" at 154.94,106.68 h1.07
  text "3.3V" at 167.259,106.68 h1.07
  text "RX0" at 154.94,104.14 h1.07
  text "GND" at 168.148,104.14 h1.07
  text "EN" at 132.842,88.138 h1.07
  text "BOOT" at 143.764,88.062 h1.07
  text "VCC" at 90.678,86.692 h1.07
  text "GND" at 90.678,82.882 h1.07
  text "B" at 90.932,79.072 h1.07
  text "GND" at 164.896,75.438 h1.07
  text "A" at 90.932,75.262 h1.07
  text "ECHO" at 163.83,72.898 h1.07
  text "TRIG" at 164.008,70.358 h1.07
  text "5V" at 165.963,67.818 h1.07
  text "VCC" at 90.678,67.134 h1.07
  text "GND" at 90.678,63.324 h1.07
  text "GND" at 164.388,61.087 h1.07
  text "B" at 90.932,59.514 h1.07
  text "TX" at 165.455,58.293 h1.07
  text "RX" at 165.455,56.007 h1.07
  text "GND" at 136.461,55.778 h1.07 r90
  text "COM" at 139.001,55.778 h1.07 r90
  text "VCC" at 141.541,55.778 h1.07 r90
  text "GND" at 146.113,55.778 h1.07 r90
  text "COM" at 148.653,55.778 h1.07 r90
  text "VCC" at 151.193,55.778 h1.07 r90
  text "GND" at 155.765,55.778 h1.07 r90
  text "COM" at 158.305,55.778 h1.07 r90
  text "VCC" at 160.845,55.778 h1.07 r90
  text "A" at 90.932,55.704 h1.07
  text "5V" at 165.455,53.467 h1.07
  text "IN1" at 137.033,47.371 h1.07 r90
  text "IN3" at 156.337,47.371 h1.07 r90
  text "IN2" at 146.685,47.244 h1.07 r90
  text "COM2" at 150.368,47.244 h1.07 r90
  text "VCC" at 115.57,47.117 h1.07 r90
  text "5V" at 119.38,47.117 h1.07 r90
  text "3.3V" at 123.317,47.117 h1.07 r90
  text "GND" at 127.508,47.117 h1.07 r90
  text "COM1" at 140.97,47.117 h1.07 r90
  text "COM3" at 159.893,47.117 h1.07 r90
  text "HAEDO" at 92.278,40.767 h1.27
  text "Smart / Parking /  / Modulo / Individual / V1.0" at 100.203,40.513 h1.07

## Text inside footprints (layer, text, board x,y; h text height)
LS1: Top Overlay "+" at 111.252,78.867 h1.07 r180
P3: Top Overlay "SDA" at 164.592,97.721 h1.07; Top Overlay "SCK" at 164.592,95.221 h1.07; Top Overlay "MOSI" at 163.881,92.721 h1.07; Top Overlay "MISO" at 163.703,90.221 h1.07; Top Overlay "GND" at 164.592,87.721 h1.07; Top Overlay "RST" at 164.592,85.221 h1.07; Top Overlay "3.3V" at 163.703,82.721 h1.07
U1: Top Overlay "*" at 130.048,115.57 h1.27